# Altium PCB Cap_EEPROM.PcbDoc
Units mm, origin at the board's own origin, x right, y up, seen from the top; angles counter-clockwise.
Board outline 152.4 x 101.6 mm, 18 copper layers (F.Cu, F.Mask, B.Cu, B.Mask, F.SilkS, B.SilkS, F.Adhes, B.Adhes, F.Paste, B.Paste, Dwgs.User, Cmts.User, Eco1.User, Eco2.User, Edge.Cuts, Margin, B.CrtYd, F.CrtYd); 3 components, 8 nets, 21 pads, 5 vias.
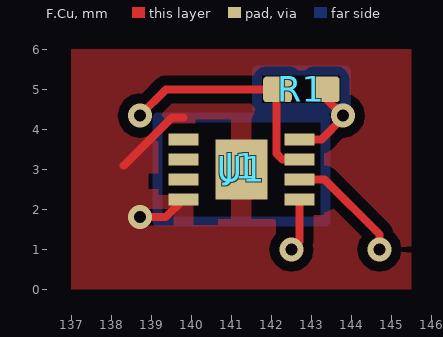
[diagram p0: F.Cu view]
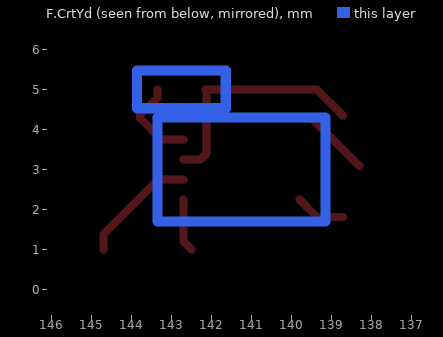
[diagram p1: F.CrtYd view, seen from below]
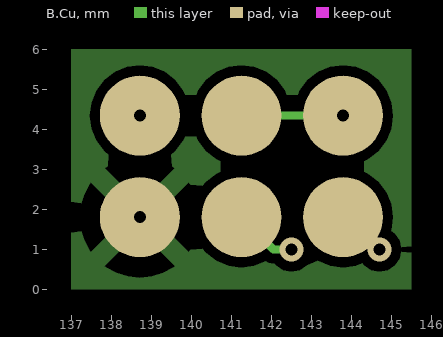
[diagram p2: B.Cu]
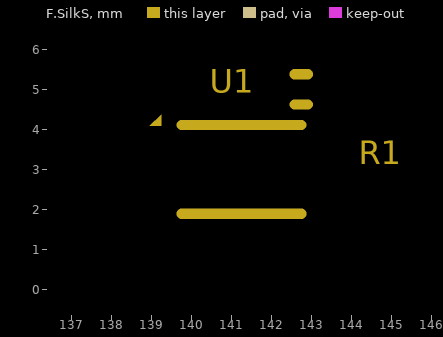
[diagram p3: F.SilkS]
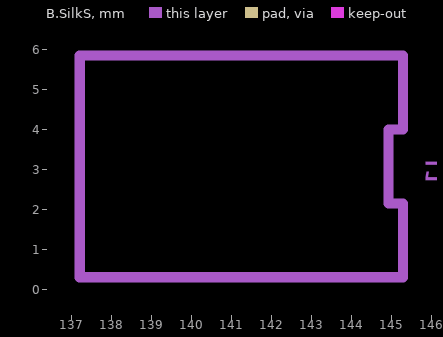
[diagram p4: B.SilkS]
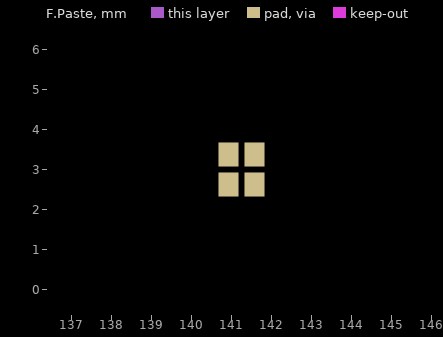
[diagram p5: F.Paste]
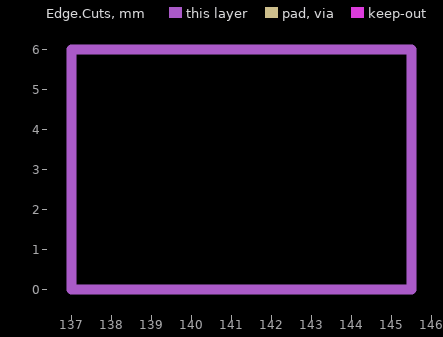
[diagram p6: Edge.Cuts]
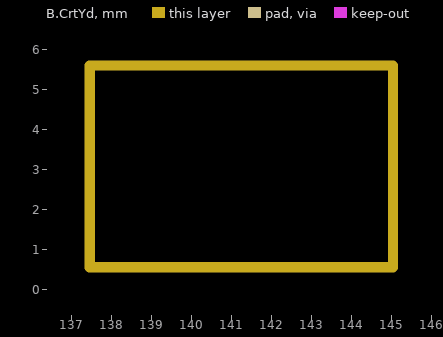
[diagram p7: B.CrtYd]

## Layer stack, top to bottom
Top Solder: solder mask 0.0102, Solder Resist, Dk 3.5
F.Cu: signal copper 0.0356
Dielectric 1: dielectric 0.32, FR-4, Dk 4.8
F.Mask: signal copper 0.0356
Dielectric2: dielectric 0.32, FR-4, Dk 4.8
B.Cu: signal copper 0.0356
Dielectric3: dielectric 0.32, FR-4, Dk 4.8
B.Mask: signal copper 0.0356
Dielectric4: dielectric 0.32, FR-4, Dk 4.8
F.SilkS: signal copper 0.0356
Dielectric5: dielectric 0.32, FR-4, Dk 4.8
B.SilkS: signal copper 0.0356
Dielectric6: dielectric 0.32, FR-4, Dk 4.8
F.Adhes: signal copper 0.0356
Dielectric7: dielectric 0.32, FR-4, Dk 4.8
B.Adhes: signal copper 0.0356
Dielectric8: dielectric 0.32, FR-4, Dk 4.8
F.Paste: signal copper 0.0356
Dielectric9: dielectric 0.32, FR-4, Dk 4.8
B.Paste: signal copper 0.0356
Dielectric10: dielectric 0.32, FR-4, Dk 4.8
Dwgs.User: signal copper 0.0356
Dielectric11: dielectric 0.32, FR-4, Dk 4.8
Cmts.User: signal copper 0.0356
Dielectric12: dielectric 0.32, FR-4, Dk 4.8
Eco1.User: signal copper 0.0356
Dielectric13: dielectric 0.32, FR-4, Dk 4.8
Eco2.User: signal copper 0.0356
Dielectric14: dielectric 0.32, FR-4, Dk 4.8
Edge.Cuts: signal copper 0.0356
Dielectric15: dielectric 0.32, FR-4, Dk 4.8
Margin: signal copper 0.0356
Dielectric16: dielectric 0.32, FR-4, Dk 4.8
B.CrtYd: signal copper 0.0356
Dielectric17: dielectric 0.32, FR-4, Dk 4.8
F.CrtYd: signal copper 0.0356
Bottom Solder: solder mask 0.0102, Solder Resist, Dk 3.5

## Board outline
25.4,25.4 177.8,25.4 177.8,127 25.4,127

## Design rules (kind name [scope] priority, off if disabled: settings)
Clearance "Clearence 0.25_Polygon" [InNamedPolygon('F.Cu-GND') OR InNamedPolygon('B.Cu-GND')] p1: gap=0.25 ignorepadtopadclearanceinfootprint=FALSE
Clearance "Clearence 0.1_PadClass" [InPadClass('Pad Class Clearance 0.1')] p2: gap=0.1 ignorepadtopadclearanceinfootprint=FALSE
MinimumSolderMaskSliver [All] p1: minsoldermaskwidth=0
PolygonConnect Polygon_B.Cu-GND_ConnectDirect [IsNamedPolygon('B.Cu-GND') vs IsVia] p1: connectstyle=Direct reliefconductorwidth=0.254 reliefentries=4 polygonreliefangle="90 Angle" airgapwidth=0.254
PolygonConnect Polygon_B.Cu-GND_ConnectRelief45 [IsNamedPolygon('B.Cu-GND') vs (IsThruPin or IsSMTPin) and (PadShape_AllLayers = 'Round')] p2: connectstyle=Relief reliefconductorwidth=0.5 reliefentries=4 polygonreliefangle="45 Angle" airgapwidth=0.5
PolygonConnect Polygon_B.Cu-GND_ConnectRelief90 [IsNamedPolygon('B.Cu-GND') vs (IsThruPin or IsSMTPin) and (PadShape_AllLayers <> 'Round')] p3: connectstyle=Relief reliefconductorwidth=0.5 reliefentries=4 polygonreliefangle="90 Angle" airgapwidth=0.5
PolygonConnect Polygon_F.Cu-GND_ConnectDirect [IsNamedPolygon('F.Cu-GND') vs IsVia] p4: connectstyle=Direct reliefconductorwidth=0.254 reliefentries=4 polygonreliefangle="90 Angle" airgapwidth=0.254
PolygonConnect Polygon_F.Cu-GND_ConnectRelief45 [IsNamedPolygon('F.Cu-GND') vs (IsThruPin or IsSMTPin) and (PadShape_AllLayers = 'Round')] p5: connectstyle=Relief reliefconductorwidth=0.5 reliefentries=4 polygonreliefangle="45 Angle" airgapwidth=0.5
PolygonConnect Polygon_F.Cu-GND_ConnectRelief90 [IsNamedPolygon('F.Cu-GND') vs (IsThruPin or IsSMTPin) and (PadShape_AllLayers <> 'Round')] p6: connectstyle=Relief reliefconductorwidth=0.5 reliefentries=4 polygonreliefangle="90 Angle" airgapwidth=0.5
RoutingVias [All] p1: holewidth=0.711 width=1.27 viastyle="Through Hole" minholewidth=0.711 minwidth=1.27 maxholewidth=0.711 maxwidth=1.27
SilkToSilkClearance [All] p1: silktosilkclearance=0
SilkToSolderMaskClearance [IsPad] p1: minsilkscreentomaskgap=0 clearancetoexposedcopper=TRUE
SolderMaskExpansion [All] p1: expansion=0.102 istentingtop=FALSE
Width [All] p1: maxlimit=10 minlimit=0.254 preferedwidth=0.254 midlayer1_maxwidth=0.254 midlayer3_maxwidth=0.254 midlayer9_maxwidth=0.254 midlayer11_maxwidth=0.254 midlayer13_maxwidth=0.254 midlayer15_maxwidth=0.254 midlayer17_maxwidth=0.254 midlayer19_maxwidth=0.254 midlayer21_maxwidth=0.254 midlayer23_maxwidth=0.254 midlayer27_maxwidth=0.254 minimp=50.000000 maximp=50.000000 favimp=50.000000
27 further rules are at their usual default settings.

## Classes and differential pairs
pad class "Pad Class Clearance 0.1": J1-1 J1-2 J1-3 J1-4 J1-5 J1-6 U1-1 U1-2 U1-3 U1-4 U1-5 U1-6 U1-7 U1-8 U1-9 U1-Un1 U1-Un2 U1-Un3 U1-Un4

## Components (designator, comment, footprint, x,y, rotation, side; value= is the part's Value field where it differs from the comment)
J1 "Comment" EEPROM_Board_Pads 141.25,3.075 r180 top value=Conn_01x06_Pin
R1 "Comment" R_0402_1005Metric_Pad0.72x0.64mm_HandSolder 142.75,5 r180 top value=1M
U1 "Comment" DFN-8-1EP_3x2mm_P0.5mm_EP1.3x1.5mm 141.25,3 r0 top value=ZD24C02B

## Footprints (in the part's own frame and the unit in brackets; to place one, negate y for a bottom-side part, rotate by r counter-clockwise, add the part's x,y. Pads: shape width x height; smd on the part's side, far side on the other; paste and mask are expansions set on the pad)
DFN-8-1EP_3x2mm_P0.5mm_EP1.3x1.5mm [mm]
  rect 0.75x0.3 smd paste-0.75 mask-0.75: 1(-1.45,0.75) 2(-1.45,0.25) 3(-1.45,-0.25) 4(-1.45,-0.75) 5(1.45,-0.75) 6(1.45,-0.25) 7(1.45,0.25) 8(1.45,0.75)
  rect 1.3x1.5 smd paste-1.5 mask-1.5: 9(0,0)
  rect 0.5x0.6 on Mid13 paste-0.6 mask-0.6: Un1(-0.325,0.375) Un2(-0.325,-0.375) Un3(0.325,0.375) Un4(0.325,-0.375)
  F.SilkS region: -2.01,1.09 -2.29,1.09 -2.01,1.37
  F.SilkS lines w0.254: -1.5,-1.11 1.5,-1.11 ; -1.5,1.11 1.5,1.11
  F.CrtYd lines w0.254: -2.1,-1.3 -2.1,1.3 2.1,1.3 2.1,-1.3 -2.1,-1.3
EEPROM_Board_Pads [mm]
  round 2 on Mid2 paste-2 mask-2: 1(-2.54,1.27) 2(0,1.27) 3(2.54,1.27) 4(2.54,-1.27) 5(0,-1.27) 6(-2.54,-1.27)
  B.SilkS lines w0.254: 4.04,2.77 -4.04,2.77 -4.04,0.923 -3.68,0.923 -3.68,-0.923 -4.04,-0.923 -4.04,-2.77 4.04,-2.77 4.04,2.77
  B.CrtYd lines w0.254: 3.79,2.52 -3.79,2.52 -3.79,-2.52 3.79,-2.52 3.79,2.52
R_0402_1005Metric_Pad0.72x0.64mm_HandSolder [mm]
  rrect25% 0.715x0.64 smd paste-0.715 mask-0.715: 1(-0.597,0) 2(0.597,0)
  F.SilkS lines w0.254: 0.168,0.38 -0.168,0.38 ; 0.168,-0.38 -0.168,-0.38
  F.CrtYd lines w0.254: 1.11,0.47 -1.11,0.47 -1.11,-0.47 1.11,-0.47 1.11,0.47

## Part data
J1: library part EEPROM_Board_Pads, Description="Generic connector, single row, 01x06, script generated", ki_fp_filters=Connector*:*_1x??_*
R1: library part R_0402_1005Metric_Pad0.72x0.64mm_HandSolder, "Resistor SMD 0402 (1005 Metric), square (rectangular) end terminal, IPC-7351 nominal with elongated pad for handsoldering. (Body size source: IPC-SM-782 page 72, https://www.pcb-3d.com/wordpress/wp-content/uploads/ipc-sm-782a_amendment_1_and_2.pdf), generated with kicad-footprint-generator", Description="Resistor, US symbol", ki_fp_filters=R_*
U1: library part DFN-8-1EP_3x2mm_P0.5mm_EP1.3x1.5mm, "8-Lead Plastic Dual Flat, No Lead Package (8MA2) - 2x3x0.6 mm Body [UDFN] (see Atmel-8815-SEEPROM-AT24CS01-02-Datasheet.pdf)", Datasheet=https://www.lcsc.com/datasheet/C28314538.pdf, Description="I2C Serial EEPROM, 2Kb (256x8), UDFN8", ki_fp_filters=DFN*3x2mm*P0.5mm*

## Via types
v1: diameter 0.6, hole 0.3, F.Cu to B.Cu, tented both sides, 5 vias

## Nets (pads, with @x,y where several pads share a name; then routed paths per layer and width w, separated by ;. In a path a pad name is that pad's centre, name@x,y a point inside that pad or via, vN(x,y) a via of type N, cw(c..) or ccw(c..) an arc to the next point about the centre after c; other vN are vias at no path point)
+3.3V: J1.5 J1.6 R1.1 U1.8 | length 4.7
  F.Cu w0.2: U1.8 143.25,3.75 143.79,4.29 v1(143.79,4.345) 143.348,4.787 R1.1
  B.Cu w0.2: J1.5 v1(143.79,4.345)
GND: J1.3 U1.4 U1.9 | length 3.3
  F.Cu w0.2: 138.3,3.1 138.315,3.1 139.515,4.3 139.8,4.3 ; v1(138.71,1.805) 139.355,1.805 U1.4
SCL: J1.1 U1.6 | length 4.2
  F.Cu w0.2: U1.6 143.327,2.75 144.7,1.377 v1(144.7,1)
  B.Cu w0.2: J1.1 144.595,1 v1(144.7,1)
SDA: J1.2 U1.5 | length 2.9
  F.Cu w0.2: v1(142.5,1) 142.7,1.2 U1.5
  B.Cu w0.2: J1.2 142.055,1 v1(142.5,1)
unconnected-(U1-A0-Pad1): U1.1
unconnected-(U1-A1-Pad2): U1.2
unconnected-(U1-A2-Pad3): U1.3
WP: J1.4 R1.2 U1.7 | length 6
  F.Cu w0.2: v1(138.71,4.345) 139.365,5 R1.2 142.124,4.971 142.124,3.399 142.273,3.25 U1.7
pads on no net: U1.Un1 U1.Un2 U1.Un3 U1.Un4
copper on no net: | length 29
  Edge.Cuts w0.254: 137,0 137,6 145.5,6 145.5,0 137,0

## Polygon pours and split planes (outlines as drawn)
GND on F.Cu "F.Cu-GND" (solid, remove dead copper, pour order 0): 137,6 145.5,6 145.5,0 137,0
GND on B.Cu "B.Cu-GND" (solid, remove dead copper, pour order 1): 137,6 145.5,6 145.5,0 137,0